# EAGLE board me433 (EAGLE 8.7.1)
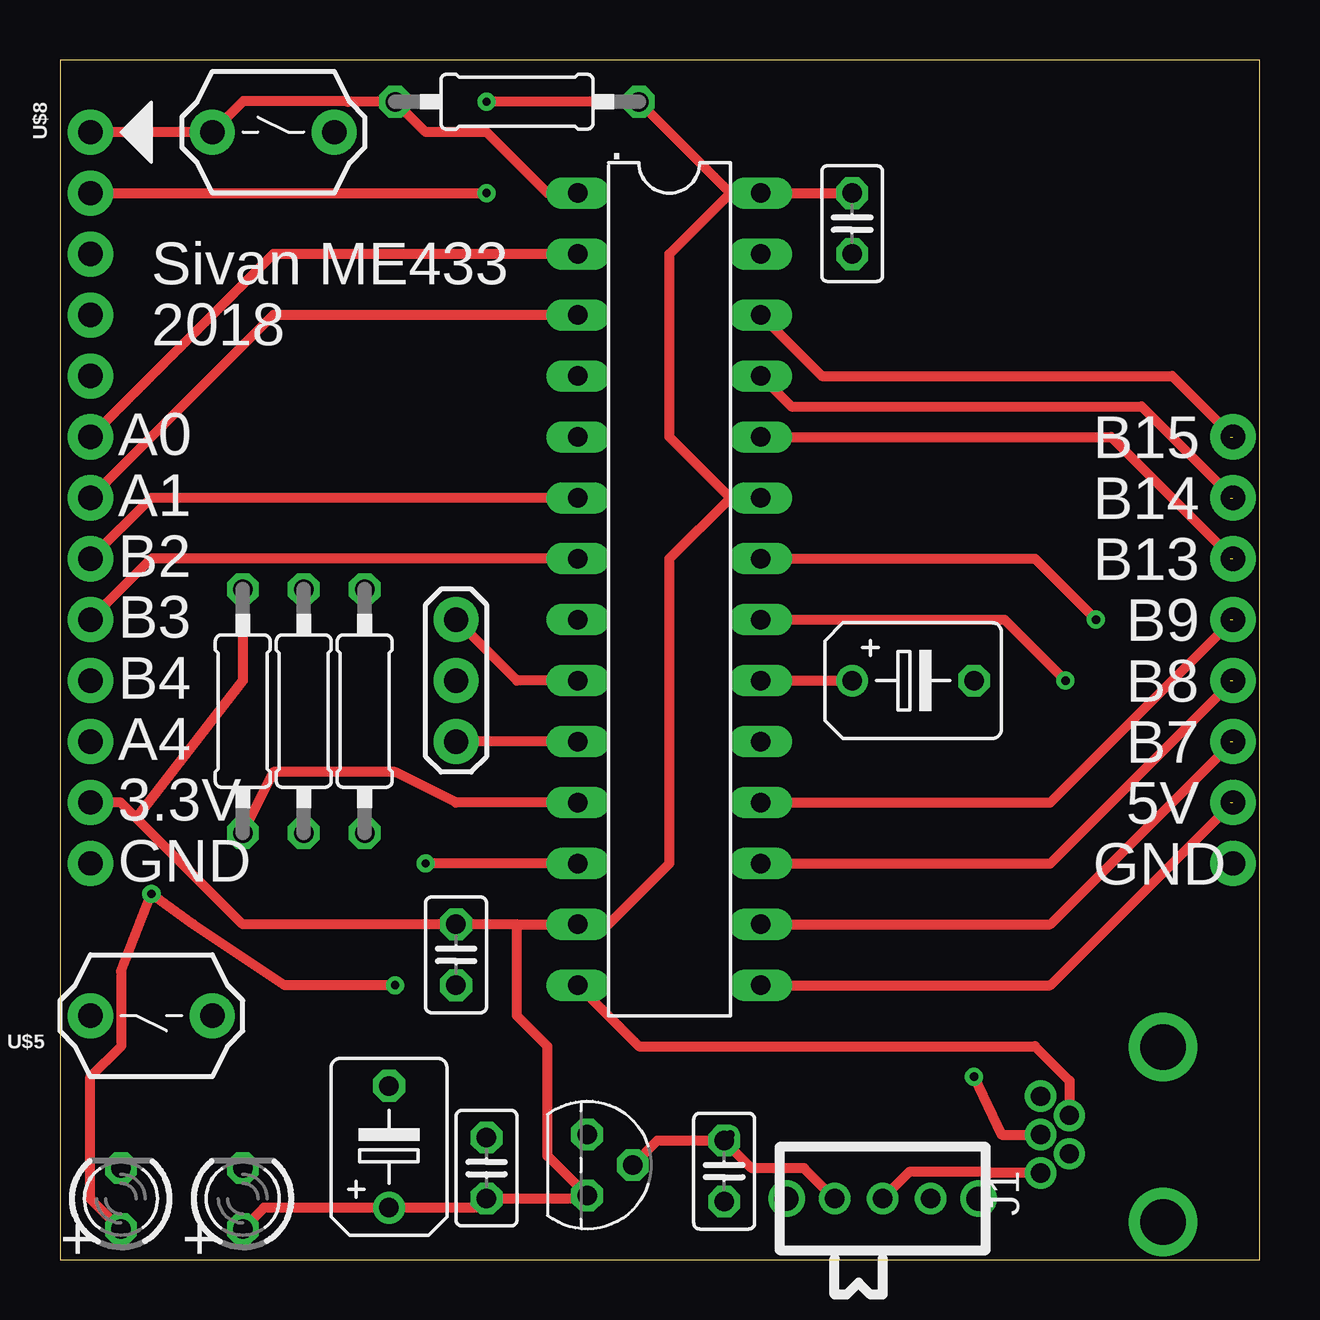
[diagram p0: board, top side]
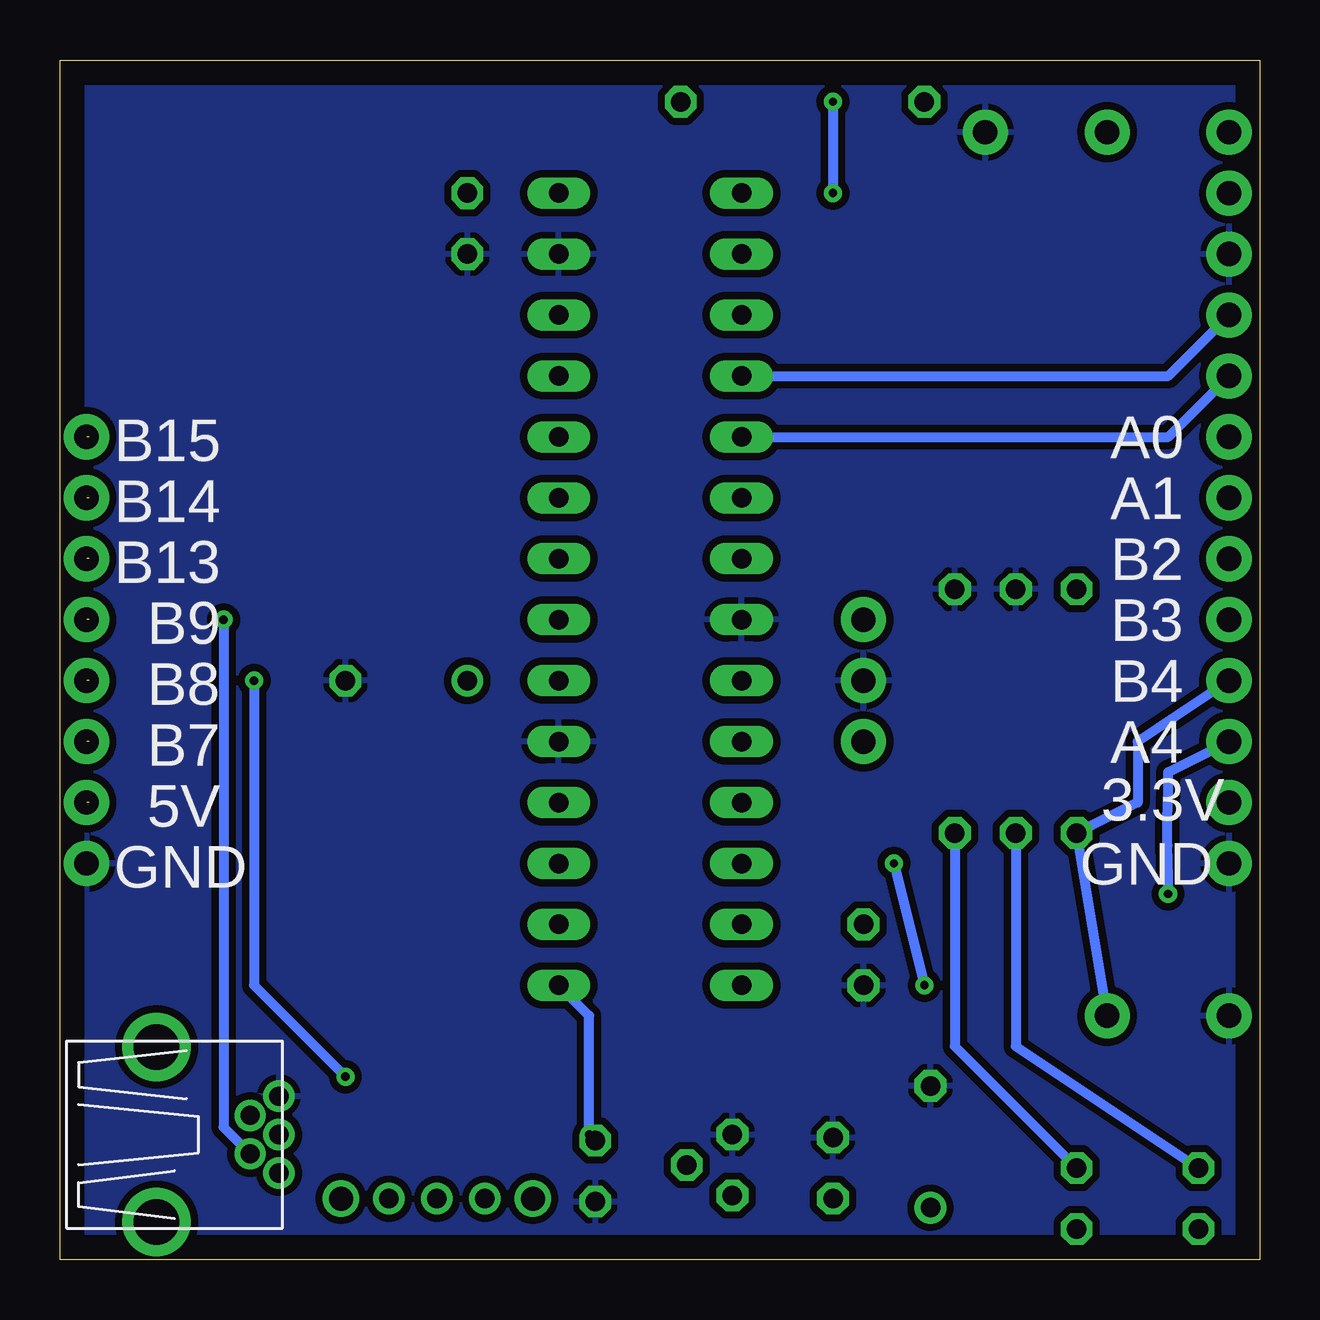
[diagram p1: board, bottom side, seen from below]

Size 50 x 50 mm. Coordinates in mm from the lower left corner, seen from the top.
Outline: 0,0 50,0 50,50 0,50 0,0
Copper layers (1*16): Top 0.035mm / dielectric 1.5mm / Bottom 0.035mm
Design rules "default": minimum track width 6mil, minimum drill 0.35mm, track to track 6mil, track to pad 6mil, pad to pad 6mil, via to via 6mil, smd to smd 6mil, copper to edge 40mil, drill to drill 6mil, minimum pad ring 10mil, minimum via ring 8mil, stop-mask expansion 4mil, vias tented up to drill 0mil, thermal gap 10mil

## Footprints (pad centres in the part's own frame; a part is rotated, then mirrored left to right if it is on the bottom)
DIL28-3 = drill 0.813 long: 1 -16.51,-3.81; 2 -13.97,-3.81; 3 -11.43,-3.81; 4 -8.89,-3.81; 5 -6.35,-3.81; 6 -3.81,-3.81; 7 -1.27,-3.81; 8 1.27,-3.81; 9 3.81,-3.81; 10 6.35,-3.81; 11 8.89,-3.81; 12 11.43,-3.81; 13 13.97,-3.81; 14 16.51,-3.81; 15 16.51,3.81; 16 13.97,3.81; 17 11.43,3.81; 18 8.89,3.81; 19 6.35,3.81; 20 3.81,3.81; 21 1.27,3.81; 22 -1.27,3.81; 23 -3.81,3.81; 24 -6.35,3.81; 25 -8.89,3.81; 26 -11.43,3.81; 27 -13.97,3.81; 28 -16.51,3.81
C025-025X050 = drill 0.813 octagon: 1 -1.27,0; 2 1.27,0
B45181B = drill 0.813: + -2.54,0 | drill 0.813 octagon: - 2.54,0
USB-MB-H = drill 0.8: D+ 5.1,0; D- 3.9,0.8; GND 5.1,-1.6; ID 3.9,-0.8; VBUS 5.1,1.6 | drill 1.9: P$6 0,-3.65; P$7 0,3.65
1X08 = drill 1.016 pad 1.88: 1 0,0; 2 2.54,0; 3 5.08,0; 4 7.62,0; 5 10.16,0; 6 12.7,0; 7 15.24,0; 8 17.78,0
LED3MM = drill 0.813 octagon: A -1.27,0; K 1.27,0
0207/10 = drill 0.813 octagon: 1 -5.08,0; 2 5.08,0
SLIDE = drill 0.8: 1 -2,0; 2 0,0; 3 2,0 | drill 1: P$1 -4,0; P$2 4,0
TO92 = drill 0.813 octagon: 1 -1.27,0; 2 0,1.905; 3 1.27,0
PB = drill 1.016 pad 1.88: 1 -2.54,0; 2 2.54,0
1X05 = drill 1.016 pad 1.88: 1 0,0; 2 2.54,0; 3 5.08,0; 4 7.62,0; 5 10.16,0
OSC = drill 1.016 pad 1.88: 1 -2.54,0; 2 0,0; 3 2.54,0

## Placement (x,y rotation side)
.  PIC32MX250F128B  [DIL28-3]  25.4,27.94 270 top
C1  0.1uF  [C025-025X050]  33.02,43.18 270 top
C2  0.1uF  [C025-025X050]  16.51,12.7 270 top
C3  0.1uF  [C025-025X050]  27.69,3.68 270 top
C4  0.1uF  [C025-025X050]  17.78,3.81 90 top
C5  10uF  [B45181B]  35.56,24.13 0 top
C6  10uF  [B45181B]  13.72,4.7 90 top
J1  USB-MB-H  [USB-MB-H]  45.97,5.21 180 top
J3  CONN_08  [1X08]  48.9,16.51 90 top
J4  CONN_08  [1X08]  1.27,16.51 90 top
LED1  Red  [LED3MM]  7.62,2.54 90 top
LED2  Green  [LED3MM]  2.54,2.54 90 top
R1  330  [0207/10]  12.7,22.86 270 top
R2  330  [0207/10]  10.16,22.86 270 top
R3  10k  [0207/10]  19.05,48.26 0 top
R4  10k  [0207/10]  7.62,22.86 90 top
U$2  SLIDE  [SLIDE]  34.29,2.54 180 top
U$3  MCP1702  [TO92]  21.97,3.94 270 top
U$5  USER  [PB]  3.81,10.16 180 top
U$8  PICKIT3  [1X05]  1.27,46.99 270 top
U$9  8MHz  [OSC]  16.51,24.13 270 top
U$10  RESET  [PB]  8.89,46.99 0 top

## Library data of the parts
. J1 J3 J4 U$2 U$3 U$5 U$8-U$10 = me433
C1-C6 R1-R4 = resistor
LED1 LED2 = led

## Nets
+3V3: ..13 ..23 ..28 C1.1 C2.1 C4.1 C6.+ J4.2 LED1.A R3.2 R4.2 U$3.3 U$8.2
+5V: ..15 C3.1 J3.2 U$2.3 U$3.2
A0: ..2 J4.8
A1: ..3 J4.7
A4/LED: ..12 J4.3 LED2.A
B2: ..6 J4.6
B3: ..7 J4.5
B4/USER: ..11 J4.4 R4.1 U$5.1
B7: ..16 J3.3
B8: ..17 J3.4
B9: ..18 J3.5
B13: ..24 J3.6
B14: ..25 J3.7
B15: ..26 J3.8
D+: ..21 J1.D+
D-: ..22 J1.D-
GND: ..8 ..19 ..27 C1.2 C2.2 C3.2 C4.2 C5.- C6.- J1.GND J3.1 J4.1 R1.1 R2.1 U$3.1 U$5.2 U$8.3 U$9.2 U$10.2
MCLR: ..1 R3.1 U$8.1 U$10.1
N$1: LED2.K R2.2
N$2: ..9 U$9.1
N$3: ..10 U$9.3
N$4: LED1.K R1.2
N$6: ..20 C5.+
PGC: ..5 U$8.5
PGD: ..4 U$8.4
USBID: ..14 J1.ID
VBUS: J1.VBUS U$2.2

## Tracks (layer width: path | path; a pad name or v marks a point on that pad's centre or on a via)
+3V3  (via drill 0.35)
  Top 0.406: LED1.A 8.51,2.16 C6.+ 17.4,2.16 C4.1 21.84,2.54 U$3.3 20.32,4.32 20.32,8.89 19.05,10.16 19.05,13.97 | 19.05,13.97 ..13 22.86,13.97 25.4,16.51 25.4,29.21 27.94,31.75 | 19.05,13.97 C2.1 7.62,13.97 3.17,18.41 | ..23 27.94,31.75 | 27.94,31.75 25.4,34.29 25.4,41.91 27.94,44.45 | C1.1 ..28 27.94,44.45 | 27.94,44.45 R3.2 v17.78,48.26 | U$8.2 v17.78,44.45 | 3.17,18.41 2.54,19.05 J4.2 | 3.17,18.41 7.62,24.13 R4.2
  Bottom 0.406: v17.78,48.26 v17.78,44.45
+5V  (via drill 0.35)  (1 unrouted)
  Top 0.406: U$2.3 31.02,3.81 28.83,3.81 C3.1 | C3.1 24.89,4.95 U$3.2 | C3.1 v27.94,5.21 | ..15 41.27,11.43 48.78,18.94 48.78,19.05
  Bottom 0.406: v27.94,5.21 27.94,10.16 ..15
A0
  Top 0.406: ..2 8.89,41.91 J4.8
A1
  Top 0.406: ..3 8.89,39.37 J4.7
A4/LED  (via drill 0.35)
  Top 0.406: LED2.A 1.27,2.54 1.27,7.62 2.56,8.91 2.56,11.97 2.54,11.99 v3.81,15.24 5.56,13.97 9.37,11.43 v13.97,11.43 | ..12 v15.24,16.51
  Bottom 0.406: v3.81,15.24 3.81,15.95 3.83,17.24 3.83,18.32 3.81,19.61 3.81,20.32 J4.3 v1.39,21.59 | v15.24,16.51 v13.97,11.43
B2
  Top 0.406: ..6 3.81,31.75 J4.6
B3
  Top 0.406: ..7 3.81,29.21 J4.5
B4/USER
  Top 0.406: ..11 16.51,19.05 13.97,20.32 8.89,20.32 R4.1
  Bottom 0.406: J4.4 5.08,21.59 5.08,19.05 R4.1 U$5.1
B7  (1 unrouted)
  Top 0.406: ..16 41.27,13.97 48.78,21.48 48.78,21.59
B8  (1 unrouted)
  Top 0.406: ..17 41.27,16.51 48.78,24.02 48.78,24.13
B9  (1 unrouted)
  Top 0.406: ..18 41.27,19.05 48.78,26.56 48.78,26.67
B13  (1 unrouted)
  Top 0.406: 48.26,29.21 48.78,29.21 48.78,29.32 43.81,34.29 ..24
B14  (1 unrouted)
  Top 0.406: ..25 30.48,35.56 45.09,35.56 48.78,31.86 48.78,31.75
B15  (1 unrouted)
  Top 0.406: ..26 31.75,36.83 46.35,36.83 48.78,34.4 48.78,34.29
D+  (via drill 0.35)
  Top 0.406: ..21 39.37,26.67 v41.91,24.13 | v38.1,7.62 39.24,5.21 J1.D+
  Bottom 0.406: v41.91,24.13 41.91,11.43 v38.1,7.62
D-  (via drill 0.35)
  Top 0.406: ..22 40.64,29.21 v43.18,26.67
  Bottom 0.406: v43.18,26.67 43.18,5.51 J1.D-
GND
  pour Bottom (isolate 0.305): 0,49.53 49.53,49.53 49.53,0 0,0
MCLR
  Top 0.406: U$8.1 U$10.1 7.64,48.28 11.97,48.28 11.99,48.26 R3.1 15.24,46.99 17.78,46.99 20.32,44.45 ..1
N$1
  Bottom 0.406: R2.2 10.16,8.89 LED2.K
N$2
  Top 0.406: ..9 19.05,24.13 U$9.1
N$3
  Top 0.406: ..10 U$9.3
N$4
  Bottom 0.406: LED1.K 12.7,8.89 R1.2
N$6
  Top 0.406: ..20 C5.+
PGC
  Bottom 0.406: ..5 3.81,34.29 U$8.5
PGD
  Bottom 0.406: ..4 3.81,36.83 U$8.4
USBID
  Top 0.406: ..14 24.13,8.89 40.64,8.89 42.07,7.46 J1.ID
VBUS
  Top 0.406: J1.VBUS 38.79,3.61 38.75,3.65 35.4,3.65 U$2.2

## Text on the board
tPlace: Sivan ME433 | 2018 | A0 | B15 | A1 | B14 | B2 | B13 | B3 | B9 | B4 | B8 | A4 | B7 | 3.3V | 5V | GND | GND | + | +
bPlace: A0 | B15 | A1 | B14 | B2 | B13 | B3 | B9 | B4 | B8 | A4 | B7 | 3.3V | 5V | GND | GND